# Altium PCB ThermalCamV1.PcbDoc
Units mm, origin at the board's own origin, x right, y up, seen from the top; angles counter-clockwise.
Board outline 38.5 x 57.5 mm, 2 copper layers (Top Layer, Bottom Layer), stack 1.571 mm thick; 10 components, 8 nets, 63 pads, 673 vias.
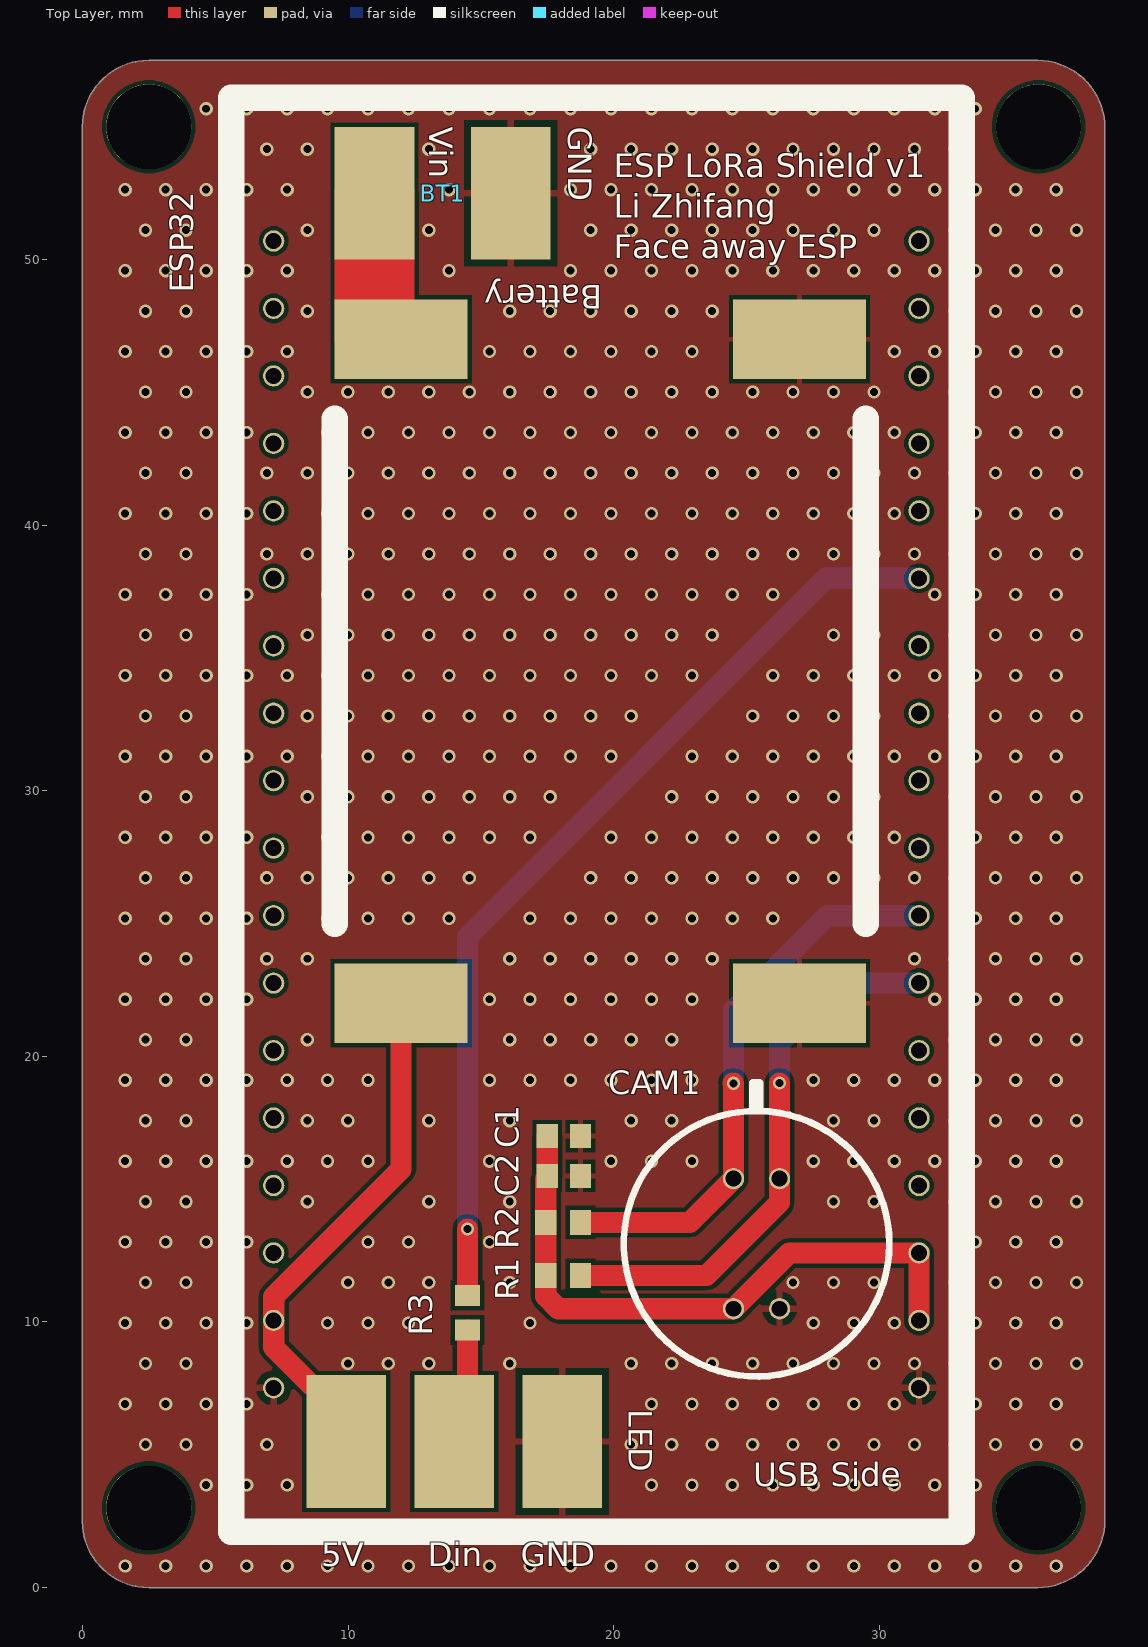
[diagram p0: Top Layer view]
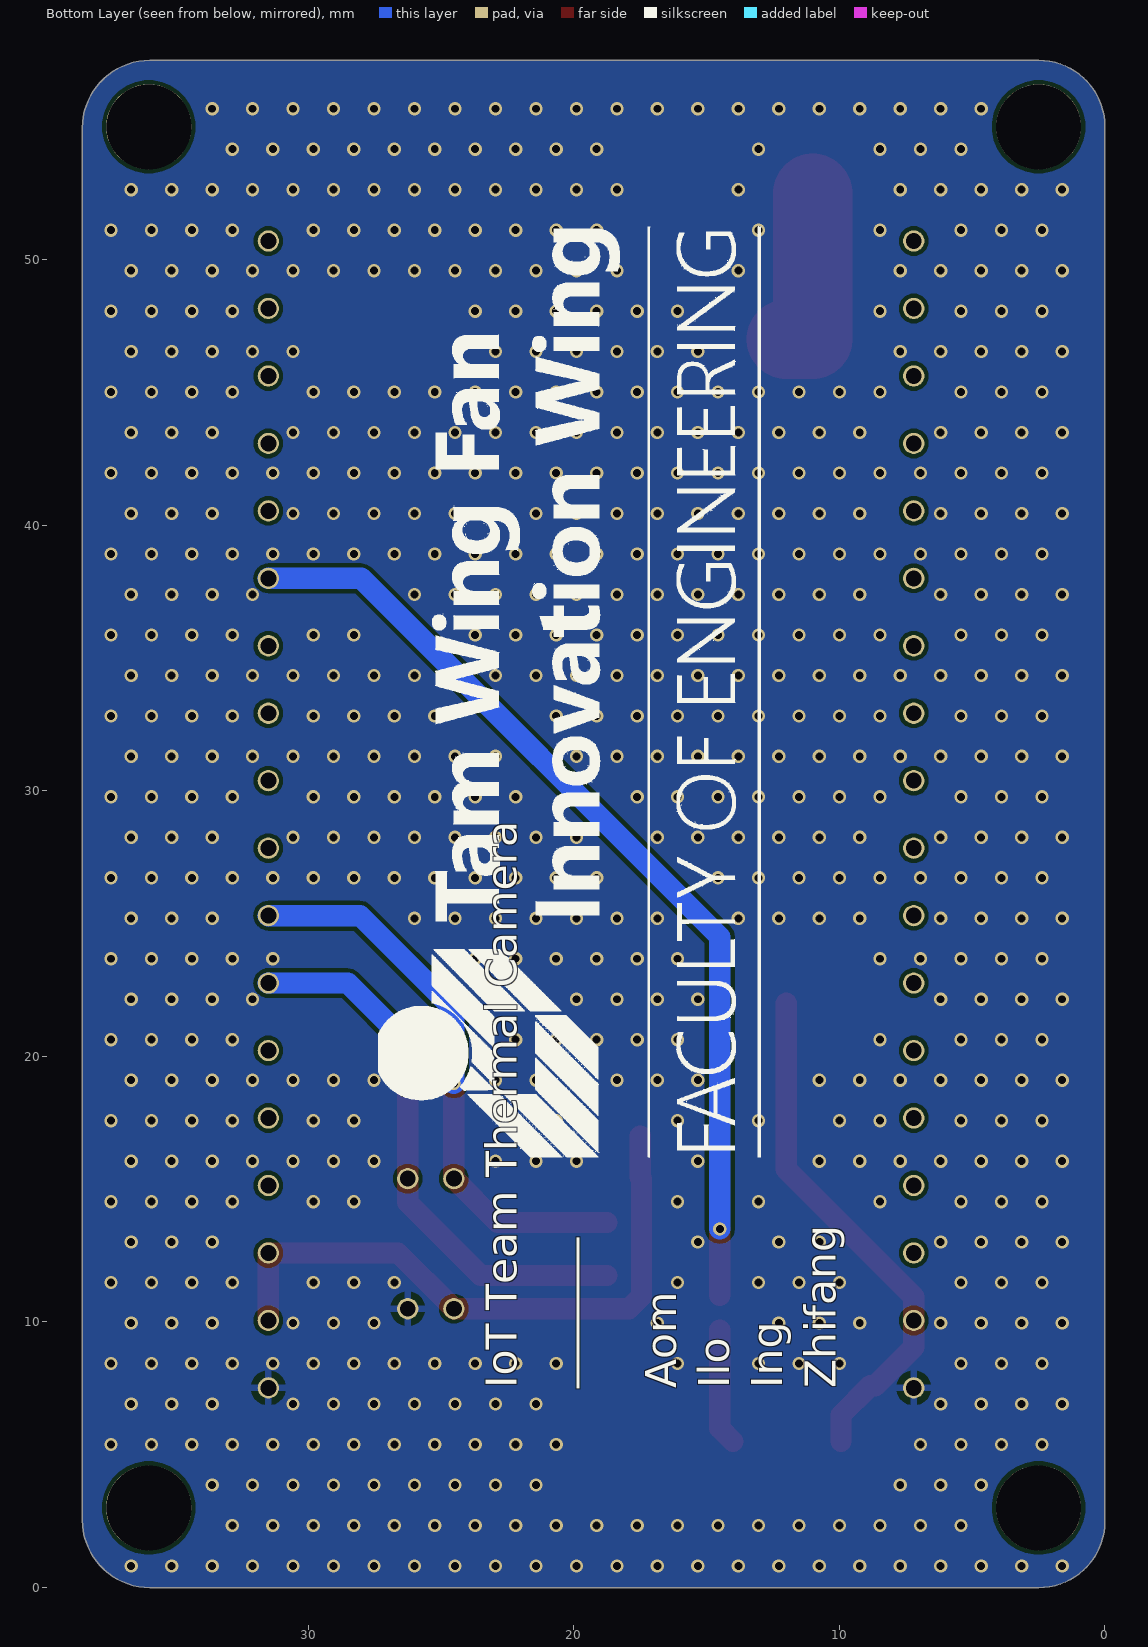
[diagram p1: Bottom Layer view, seen from below]

## Layer stack, top to bottom
Top Solder: solder mask 0.0102, Solder Resist, Dk 3.5
Top Layer: signal copper 0.0356
Dielectric 1: dielectric 1.5, FR-4, Dk 4.8
Bottom Layer: signal copper 0.0356
Bottom Solder: solder mask 0.0102, Solder Resist, Dk 3.5

## Board outline
0,2.5 ccw(c2.5,2.5) 2.5,0 35.96,0 ccw(c35.96,2.54) 38.5,2.54 38.5,54.96 ccw(c35.96,54.96) 35.96,57.5 2.5,57.5 ccw(c2.5,55) 0,55

## Design rules (kind name [scope] priority, off if disabled: settings)
Clearance [All] p1: gap=0.15 ignorepadtopadclearanceinfootprint=FALSE
ComponentClearance [All] p1: gap=0 collisioncheckmode=3 verticalgap=0.254 showdistances=FALSE
DiffPairsRouting [All] p1: maxlimit=1 minlimit=0.127 mostfreqgap=0.2 toplayer_minwidth=0.127 toplayer_maxwidth=0.2 toplayer_prefwidth=0.2 bottomlayer_minwidth=0.127 bottomlayer_maxwidth=0.2 bottomlayer_prefwidth=0.2 maxuncoupledlength=12.7
Height ESP_Shield [InComponent('No Component')] p1: minheight=0 maxheight=0 prefheight=0
Height [All] p2: minheight=0 maxheight=500 prefheight=12.7
HoleSize [All] p1: absolutevalues=TRUE maxlimit=6.3 minlimit=0.025 maxpercent=80.000 minpercent=20.000
MinimumSolderMaskSliver [All] p1: minsoldermaskwidth=0.04
PolygonConnect CertainComponents [InComponent('C0','C00') vs InNet('GND')] p1: connectstyle=Direct reliefconductorwidth=0.2 reliefentries=4 polygonreliefangle="90 Angle" airgapwidth=0.2 // force certain component to be conencted with relieft connection
PolygonConnect GND [InNet('GND')] p2: thpad.connectstyle=Relief thpad.reliefconductorwidth=0.2 thpad.reliefentries=4 thpad.polygonreliefangle="90 Angle" thpad.airgapwidth=0.15 smdpad.connectstyle=Relief smdpad.reliefconductorwidth=0.2 smdpad.reliefentries=4 smdpad.polygonreliefangle="90 Angle" smdpad.airgapwidth=0.15 via.connectstyle=Direct via.reliefconductorwidth=0.254 via.reliefentries=4 via.polygonreliefangle="90 Angle" via.airgapwidth=0.254
PolygonConnect [All] p3: connectstyle=Direct reliefconductorwidth=0.3 reliefentries=4 polygonreliefangle="90 Angle" airgapwidth=0.127
RoutingVias [All] p1: holewidth=0.3 width=0.5 viastyle="Through Hole" minholewidth=0.3 minwidth=0.5 maxholewidth=6 maxwidth=6.3
SilkToSilkClearance [All] p1: silktosilkclearance=0.04
SilkToSolderMaskClearance [IsPad] p1: minsilkscreentomaskgap=0.102 clearancetoexposedcopper=TRUE
SolderMaskExpansion [All] p1: expansion=0.102 istentingtop=FALSE
SupplyNets "Schematic Supply Nets_4" [InNet('Vin')] p1: voltage=0.000
SupplyNets "Schematic Supply Nets_3" [InNet('Din')] p2: voltage=0.000
SupplyNets "Schematic Supply Nets_2" [InNet('5V')] p3: voltage=0.000
SupplyNets "Schematic Supply Nets_1" [InNet('GND')] p4: voltage=0.000
SupplyNets "Schematic Supply Nets" [InNet('3V3')] p5: voltage=0.000
Width [All] p1: maxlimit=3 minlimit=0.127 preferedwidth=0.2
23 further rules are at their usual default settings.

## Components (designator, comment, footprint, x,y, rotation, side; value= is the part's Value field where it differs from the comment)
Battery "Buck Converter" BuckConverter 19.5,34.5 r270 top (schematic designator U1)
BT1 "Battery Pack" "Battery Pads" 13.565,52.5 r0 top
C1 "0.1uF 25V 0603" CAPC1608X87X35LL15T15 18.125,17 r180 top
C2 "1uF 25V 0603" CAPC1608X87X35LL15T15 18.125,15.5 r180 top
CAM1 "MLX90640" MLX90640 25.383,12.948 r90 top
ESP32 "ESP32 LoRa Board" "ESP32 LoRa Board" 19.35,29.1 r0 top (schematic designator ESP1)
LED "LED Strip" "LED Strip" 14,5.5 r0 top (schematic designator J1)
R1 "10kΩ 0603" RESC1609X50X30NL8T20 18.1,11.75 r0 top
R2 "10kΩ 0603" RESC1609X50X30NL8T20 18.1,13.75 r180 top
R3 "220Ω 0603" RESC1609X50X30NL8T20 14.5,10.35 r270 top

## Footprints (in the part's own frame and the unit in brackets; to place one, negate y for a bottom-side part, rotate by r counter-clockwise, add the part's x,y. Pads: shape width x height; smd on the part's side, far side on the other; paste and mask are expansions set on the pad)
"Battery Pads" [mm]
  rect 3x5 smd: 1(-2.565,0) 2(2.565,0)
BuckConverter [mm]
  rect 3x5 smd: 1(-12.5,-7.5) 2(-12.5,7.5) 2(12.5,7.5) 3(12.5,-7.5)
  silkscreen extent -9.5,-10 9.5,10
CAPC1608X87X35LL15T15 [mm] "Chip Capacitor, 2-Leads, Body 1.60x0.80mm, IPC High Density"
  rect 0.8x0.9 smd: 1(-0.625,0) 2(0.625,0)
  body extent -0.87,-0.48 0.87,0.48, height 0.87
"ESP32 LoRa Board" [mm]
  round 0.8 hole 0.6: 1(12.15,21.6) 2(-12.15,21.6) 3(12.15,19.06) 4(-12.15,19.06) 5(12.15,16.52) 6(-12.15,16.52) 7(12.15,13.98) 8(-12.15,13.98) 9(12.15,11.44) 10(-12.15,11.44) 11(12.15,8.9) 12(-12.15,8.9) 13(12.15,6.36) 14(-12.15,6.36) 15(12.15,3.82) 16(-12.15,3.82) 17(12.15,1.28) 18(-12.15,1.28) 19(12.15,-1.26) 20(-12.15,-1.26) 21(12.15,-3.8) 22(-12.15,-3.8) 23(12.15,-6.34) 24(-12.15,-6.34) 25(12.15,-8.88) 26(-12.15,-8.88) 27(12.15,-11.42) 28(-12.15,-11.42) 29(12.15,-13.96) 30(-12.15,-13.96) 31(12.15,-16.5) 32(-12.15,-16.5) 33(12.15,-19.04) 34(-12.15,-19.04) 35(12.15,-21.58) 36(-12.15,-21.58)
  silkscreen extent -13.75,-27 13.75,27
"LED Strip" [mm]
  rect 3x5 smd: 1(-4.064,0) 2(0,0) 3(4.064,0)
MLX90640 [mm]
  round 0.8 hole 0.6: 1(-2.448,0.867) 2(-2.448,-0.867) 3(2.448,0.867) 4(2.448,-0.867)
  silkscreen extent -5,-5 5,5
RESC1609X50X30NL8T20 [mm] "Chip Resistor, 2-Leads, Body 1.65x0.95mm, IPC Medium Density"
  rect 0.8x0.95 smd: 1(-0.65,0) 2(0.65,0)
  body extent -0.82,-0.48 0.82,0.48, height 0.5

## Part data
C1 C2: library part CMP-2006-03713-1, Manufacturer=Kemet, Part Number=C0603C105K3RACTU
R1 R2 R3: library part CMP-2000-03816-5, "Chip Resistor, 0 Ohm, Jumper, 100 mW, -55 to 155 degC, 0603 (1608 Metric), RoHS, Tape and Reel", Manufacturer="Vishay Semiconductor", Max Operating Temperature="155 degC", Min Operating Temperature="-55 degC", Package Quantity=5000, Voltage Rating="75 V", ComponentLink1Description="Manufacturer URL", ComponentLink1URL=http://www.vishay.com/, ComponentLink2Description=Datasheet, ComponentLink2URL=http://www.vishay.com/docs/20035/dcrcwe3.pdf, DatasheetVersion=06/2012, Height="0.45 mm", Length="1.55 mm", Mount="Surface Mount", Mounting Technology="Surface Mount", PackageDescription="2-Pin Surface Mount Device, Body 1.575 x 0.85 mm", PackageReference=0603, Packaging="Tape and Reel", Pins=2, REACH SVHC=Unknown, RoHSCompliant=true

## Free pads (board coordinates)
  round 3.2 hole 3.2 unplated: 37(2.5,55) 38(36,55) 39(2.5,3) 40(36,3)

## Via types
v1: diameter 0.5, hole 0.3, Top Layer to Bottom Layer, tented both sides, 673 vias

## Nets (pads, with @x,y where several pads share a name; then routed paths per layer and width w, separated by ;. In a path a pad name is that pad's centre, name@x,y a point inside that pad or via, vN(x,y) a via of type N, cw(c..) or ccw(c..) an arc to the next point about the centre after c; other vN are vias at no path point)
3V3: C1.2 C2.2 CAM1.1 ESP32.31 ESP32.33 R1.1 R2.2 | length 23.7
  Top Layer w0.8: C1.2 C2.2 17.5,15.45 17.45,15.4 R2.2 R1.1 17.45,10.969 17.919,10.5 CAM1.1 26.615,12.6 ESP32.31 ESP32.33
5V: Battery.3 ESP32.34 LED.1 | length 19.7
  Top Layer w0.8: LED.1 9.936,6.5 8.836,7.6 8.65,7.6 7.2,9.05 7.2,10.95 12,15.75 Battery.3
Din: LED.2 R3.2 | length 4.4
  Top Layer w0.8: LED.2 14.5,6 R3.2
GND: Battery.2 BT1.2 C1.1 C2.1 CAM1.2 ESP32.35 ESP32.36 LED.3
  other v1: 1.612,0.816 3.136,0.816 4.66,0.816 6.184,0.816 7.708,0.816 9.232,0.816 10.756,0.816 12.28,0.816 13.804,0.816 15.328,0.816 16.852,0.816 18.376,0.816 19.9,0.816 21.424,0.816 22.948,0.816 24.472,0.816 25.996,0.816 27.52,0.816 29.044,0.816 30.568,0.816 32.092,0.816 33.616,0.816 35.14,0.816 36.664,0.816 5.422,2.34 6.946,2.34 8.47,2.34 9.994,2.34 11.518,2.34 13.042,2.34 14.566,2.34 16.09,2.34 17.614,2.34 19.138,2.34 20.662,2.34 22.186,2.34 23.71,2.34 25.234,2.34 26.758,2.34 28.282,2.34 29.806,2.34 31.33,2.34 32.854,2.34 4.66,3.864 6.184,3.864 7.708,3.864 21.424,3.864 22.948,3.864 24.472,3.864 25.996,3.864 27.52,3.864 29.044,3.864 30.568,3.864 32.092,3.864 33.616,3.864 2.374,5.388 3.898,5.388 5.422,5.388 6.946,5.388 20.662,5.388 22.186,5.388 23.71,5.388 25.234,5.388 26.758,5.388 28.282,5.388 29.806,5.388 31.33,5.388 32.854,5.388 34.378,5.388 35.902,5.388 37.426,5.388 1.612,6.912 3.136,6.912 4.66,6.912 6.184,6.912 21.424,6.912 22.948,6.912 24.472,6.912 25.996,6.912 27.52,6.912 29.044,6.912 30.568,6.912 33.616,6.912 35.14,6.912 36.664,6.912 2.374,8.436 3.898,8.436 5.422,8.436 9.994,8.436 11.518,8.436 13.042,8.436 16.09,8.436 20.662,8.436 22.186,8.436 23.71,8.436 25.234,8.436 26.758,8.436 28.282,8.436 29.806,8.436 31.33,8.436 32.854,8.436 34.378,8.436 35.902,8.436 37.426,8.436 1.612,9.96 3.136,9.96 4.66,9.96 6.184,9.96 9.232,9.96 10.756,9.96 12.28,9.96 16.852,9.96 27.52,9.96 29.044,9.96 30.568,9.96 33.616,9.96 35.14,9.96 36.664,9.96 2.374,11.484 3.898,11.484 5.422,11.484 9.994,11.484 11.518,11.484 13.042,11.484 16.09,11.484 26.758,11.484 28.282,11.484 29.806,11.484 32.854,11.484 34.378,11.484 35.902,11.484 37.426,11.484 1.612,13.008 3.136,13.008 4.66,13.008 6.184,13.008 10.756,13.008 12.28,13.008 15.328,13.008 33.616,13.008 35.14,13.008 36.664,13.008 2.374,14.532 3.898,14.532 5.422,14.532 8.47,14.532 13.042,14.532 16.09,14.532 28.282,14.532 29.806,14.532 32.854,14.532 34.378,14.532 35.902,14.532 37.426,14.532 1.612,16.056 3.136,16.056 4.66,16.056 6.184,16.056 7.708,16.056 9.232,16.056 10.756,16.056 15.328,16.056 19.9,16.056 21.424,16.056 22.948,16.056 27.52,16.056 29.044,16.056 30.568,16.056 32.092,16.056 33.616,16.056 35.14,16.056 36.664,16.056 2.374,17.58 3.898,17.58 5.422,17.58 8.47,17.58 9.994,17.58 13.042,17.58 16.09,17.58 20.662,17.58 22.186,17.58 28.282,17.58 29.806,17.58 32.854,17.58 34.378,17.58 35.902,17.58 37.426,17.58 1.612,19.104 3.136,19.104 4.66,19.104 6.184,19.104 7.708,19.104 9.232,19.104 10.756,19.104 15.328,19.104 16.852,19.104 18.376,19.104 19.9,19.104 21.424,19.104 22.948,19.104 27.52,19.104 29.044,19.104 30.568,19.104 32.092,19.104 33.616,19.104 35.14,19.104 36.664,19.104 2.374,20.628 3.898,20.628 5.422,20.628 8.47,20.628 16.09,20.628 17.614,20.628 19.138,20.628 20.662,20.628 22.186,20.628 32.854,20.628 34.378,20.628 35.902,20.628 37.426,20.628 1.612,22.152 3.136,22.152 4.66,22.152 6.184,22.152 15.328,22.152 16.852,22.152 18.376,22.152 19.9,22.152 21.424,22.152 22.948,22.152 32.092,22.152 33.616,22.152 35.14,22.152 36.664,22.152 2.374,23.676 3.898,23.676 5.422,23.676 6.946,23.676 8.47,23.676 16.09,23.676 17.614,23.676 19.138,23.676 20.662,23.676 22.186,23.676 23.71,23.676 31.33,23.676 32.854,23.676 34.378,23.676 35.902,23.676 37.426,23.676 1.612,25.2 3.136,25.2 4.66,25.2 6.184,25.2 9.232,25.2 10.756,25.2 12.28,25.2 13.804,25.2 16.852,25.2 18.376,25.2 19.9,25.2 21.424,25.2 22.948,25.2 24.472,25.2 25.996,25.2 33.616,25.2 35.14,25.2 36.664,25.2 2.374,26.724 3.898,26.724 5.422,26.724 6.946,26.724 8.47,26.724 9.994,26.724 11.518,26.724 13.042,26.724 14.566,26.724 19.138,26.724 20.662,26.724 22.186,26.724 23.71,26.724 25.234,26.724 26.758,26.724 28.282,26.724 29.806,26.724 31.33,26.724 32.854,26.724 34.378,26.724 35.902,26.724 37.426,26.724 1.612,28.248 3.136,28.248 4.66,28.248 6.184,28.248 9.232,28.248 10.756,28.248 12.28,28.248 13.804,28.248 15.328,28.248 16.852,28.248 19.9,28.248 21.424,28.248 22.948,28.248 24.472,28.248 25.996,28.248 27.52,28.248 29.044,28.248 30.568,28.248 33.616,28.248 35.14,28.248 36.664,28.248 2.374,29.772 3.898,29.772 5.422,29.772 8.47,29.772 9.994,29.772 11.518,29.772 13.042,29.772 14.566,29.772 16.09,29.772 17.614,29.772 22.186,29.772 23.71,29.772 25.234,29.772 26.758,29.772 28.282,29.772 29.806,29.772 32.854,29.772 34.378,29.772 35.902,29.772 37.426,29.772 1.612,31.296 3.136,31.296 4.66,31.296 6.184,31.296 7.708,31.296 9.232,31.296 10.756,31.296 12.28,31.296 13.804,31.296 15.328,31.296 16.852,31.296 18.376,31.296 19.9,31.296 22.948,31.296 24.472,31.296 25.996,31.296 27.52,31.296 29.044,31.296 30.568,31.296 32.092,31.296 33.616,31.296 35.14,31.296 36.664,31.296 2.374,32.82 3.898,32.82 5.422,32.82 8.47,32.82 9.994,32.82 11.518,32.82 13.042,32.82 14.566,32.82 16.09,32.82 17.614,32.82 19.138,32.82 20.662,32.82 25.234,32.82 26.758,32.82 28.282,32.82 29.806,32.82 32.854,32.82 34.378,32.82 35.902,32.82 37.426,32.82 1.612,34.344 3.136,34.344 4.66,34.344 6.184,34.344 7.708,34.344 9.232,34.344 10.756,34.344 12.28,34.344 13.804,34.344 15.328,34.344 16.852,34.344 18.376,34.344 19.9,34.344 21.424,34.344 22.948,34.344 25.996,34.344 27.52,34.344 29.044,34.344 30.568,34.344 32.092,34.344 33.616,34.344 35.14,34.344 36.664,34.344 2.374,35.868 3.898,35.868 5.422,35.868 8.47,35.868 9.994,35.868 11.518,35.868 13.042,35.868 14.566,35.868 16.09,35.868 17.614,35.868 19.138,35.868 20.662,35.868 22.186,35.868 23.71,35.868 28.282,35.868 29.806,35.868 32.854,35.868 34.378,35.868 35.902,35.868 37.426,35.868 1.612,37.392 3.136,37.392 4.66,37.392 6.184,37.392 9.232,37.392 10.756,37.392 12.28,37.392 13.804,37.392 15.328,37.392 16.852,37.392 18.376,37.392 19.9,37.392 21.424,37.392 22.948,37.392 24.472,37.392 25.996,37.392 32.092,37.392 33.616,37.392 35.14,37.392 36.664,37.392 2.374,38.916 3.898,38.916 5.422,38.916 6.946,38.916 8.47,38.916 9.994,38.916 11.518,38.916 13.042,38.916 14.566,38.916 16.09,38.916 17.614,38.916 19.138,38.916 20.662,38.916 22.186,38.916 23.71,38.916 25.234,38.916 26.758,38.916 28.282,38.916 29.806,38.916 31.33,38.916 32.854,38.916 34.378,38.916 35.902,38.916 37.426,38.916 1.612,40.44 3.136,40.44 4.66,40.44 6.184,40.44 9.232,40.44 10.756,40.44 12.28,40.44 13.804,40.44 15.328,40.44 16.852,40.44 18.376,40.44 19.9,40.44 21.424,40.44 22.948,40.44 24.472,40.44 25.996,40.44 27.52,40.44 29.044,40.44 30.568,40.44 33.616,40.44 35.14,40.44 36.664,40.44 2.374,41.964 3.898,41.964 5.422,41.964 6.946,41.964 8.47,41.964 9.994,41.964 11.518,41.964 13.042,41.964 14.566,41.964 16.09,41.964 17.614,41.964 19.138,41.964 20.662,41.964 22.186,41.964 23.71,41.964 25.234,41.964 26.758,41.964 28.282,41.964 29.806,41.964 31.33,41.964 32.854,41.964 34.378,41.964 35.902,41.964 37.426,41.964 1.612,43.488 3.136,43.488 4.66,43.488 6.184,43.488 9.232,43.488 10.756,43.488 12.28,43.488 13.804,43.488 15.328,43.488 16.852,43.488 18.376,43.488 19.9,43.488 21.424,43.488 22.948,43.488 24.472,43.488 25.996,43.488 27.52,43.488 29.044,43.488 30.568,43.488 33.616,43.488 35.14,43.488 36.664,43.488 2.374,45.012 3.898,45.012 5.422,45.012 8.47,45.012 9.994,45.012 11.518,45.012 13.042,45.012 14.566,45.012 16.09,45.012 17.614,45.012 19.138,45.012 20.662,45.012 22.186,45.012 23.71,45.012 25.234,45.012 26.758,45.012 28.282,45.012 29.806,45.012 32.854,45.012 34.378,45.012 35.902,45.012 37.426,45.012 1.612,46.536 3.136,46.536 4.66,46.536 6.184,46.536 7.708,46.536 15.328,46.536 16.852,46.536 18.376,46.536 19.9,46.536 21.424,46.536 22.948,46.536 30.568,46.536 32.092,46.536 33.616,46.536 35.14,46.536 36.664,46.536 2.374,48.06 3.898,48.06 5.422,48.06 8.47,48.06 16.09,48.06 17.614,48.06 19.138,48.06 20.662,48.06 22.186,48.06 23.71,48.06 32.854,48.06 34.378,48.06 35.902,48.06 37.426,48.06 1.612,49.584 3.136,49.584 4.66,49.584 6.184,49.584 7.708,49.584 13.804,49.584 18.376,49.584 19.9,49.584 21.424,49.584 22.948,49.584 24.472,49.584 25.996,49.584 27.52,49.584 29.044,49.584 30.568,49.584 32.092,49.584 33.616,49.584 35.14,49.584 36.664,49.584 2.374,51.108 3.898,51.108 5.422,51.108 8.47,51.108 13.042,51.108 19.138,51.108 20.662,51.108 22.186,51.108 23.71,51.108 25.234,51.108 26.758,51.108 28.282,51.108 29.806,51.108 32.854,51.108 34.378,51.108 35.902,51.108 37.426,51.108 1.612,52.632 3.136,52.632 4.66,52.632 6.184,52.632 7.708,52.632 13.804,52.632 18.376,52.632 19.9,52.632 21.424,52.632 22.948,52.632 24.472,52.632 25.996,52.632 27.52,52.632 29.044,52.632 30.568,52.632 32.092,52.632 33.616,52.632 35.14,52.632 36.664,52.632 5.422,54.156 6.946,54.156 8.47,54.156 13.042,54.156 19.138,54.156 20.662,54.156 22.186,54.156 23.71,54.156 25.234,54.156 26.758,54.156 28.282,54.156 29.806,54.156 31.33,54.156 32.854,54.156 4.66,55.68 6.184,55.68 7.708,55.68 9.232,55.68 10.756,55.68 12.28,55.68 13.804,55.68 15.328,55.68 16.852,55.68 18.376,55.68 19.9,55.68 21.424,55.68 22.948,55.68 24.472,55.68 25.996,55.68 27.52,55.68 29.044,55.68 30.568,55.68 32.092,55.68 33.616,55.68
NetCAM1_3: CAM1.3 ESP32.21 R2.1 | length 21.3
  Top Layer w0.8: R2.1 22.87,13.75 CAM1.3 v1(24.515,18.985) v1@24.5,19
  Bottom Layer w0.8: v1(24.515,18.985) 24.515,21.765 28.05,25.3 ESP32.21
NetCAM1_4: CAM1.4 ESP32.23 R1.2 | length 20.8
  Top Layer w0.8: R1.2 23.5,11.75 26.25,14.5 CAM1.4 v1(26.25,19)
  Bottom Layer w0.8: v1(26.25,19) 26.25,20.5 28.51,22.76 ESP32.23
NetESP1_11: ESP32.11 R3.1 | length 36.1
  Top Layer w0.8: R3.1 v1(14.5,13.5)
  Bottom Layer w0.8: v1(14.5,13.5) 14.5,24.5 28,38 ESP32.11
Vin: Battery.1 BT1.1 | length 6.5
  Top Layer w3: BT1.1 11,47 Battery.1
pads on no net: ESP32.1 ESP32.2 ESP32.3 ESP32.4 ESP32.5 ESP32.6 ESP32.7 ESP32.8 ESP32.9 ESP32.10 ESP32.12 ESP32.13 ESP32.14 ESP32.15 ESP32.16 ESP32.17 ESP32.18 ESP32.19 ESP32.20 ESP32.22 ESP32.24 ESP32.25 ESP32.26 ESP32.27 ESP32.28 ESP32.29 ESP32.30 ESP32.32

## Polygon pours and split planes (outlines as drawn)
GND on Top Layer "NONET_L-01_P-001" (solid, pour order 0): 0,2.5 0,55 cw(c2.5,55) 2.5,57.5 35.96,57.5 cw(c35.96,54.96) 38.5,54.96 38.5,2.54 cw(c35.96,2.54) 35.96,0 2.5,0 cw(c2.5,2.5)
GND on Bottom Layer "NONET_L-01_P-001" (solid, pour order 1): 0,2.5 0,55 cw(c2.5,55) 2.5,57.5 35.96,57.5 cw(c35.96,54.96) 38.5,54.96 38.5,2.54 cw(c35.96,2.54) 35.96,0 2.5,0 cw(c2.5,2.5)

## Silkscreen, mask and mechanical layers (free items; w line width, h text height)
Top Overlay:
  lines w0.3: 25.25,18 25.25,19 25.5,19 25.5,18
  text "Vin" at 12.75,55 h1.52 r270
  text "GND" at 18,55 h1.52 r270
  text "ESP LoRa Shield v1 / Li Zhifang / Face away ESP" at 20,49.75 h1.52
  text "5V" at 9,0.5 h1.52
  text "Din" at 13,0.5 h1.52
  text "GND" at 16.5,0.5 h1.52
Bottom Overlay:
  drawing of 364 lines, arcs and shapes, not listed
  text "IoT Team Thermal Camera / _______ /  / Aom / Ilo / Ing / Zhifang" at 9.75,7.5 h2 r270
Mechanical 1:
  lines w0.3: 0,2.5 ccw(c2.5,2.5) 2.5,0 35.96,0 ccw(c35.96,2.54) 38.5,2.54 38.5,3 38.5,54.96 ccw(c35.96,54.96) 35.96,57.5 2.5,57.5 ccw(c2.5,55) 0,55 0,2.5

## Text inside footprints (layer, text, board x,y; h text height)
ESP32: Top Overlay "USB Side" at 25.256,3.516 h1.52